# EAGLE board rfid_nrf24 (EAGLE 7.7.0)
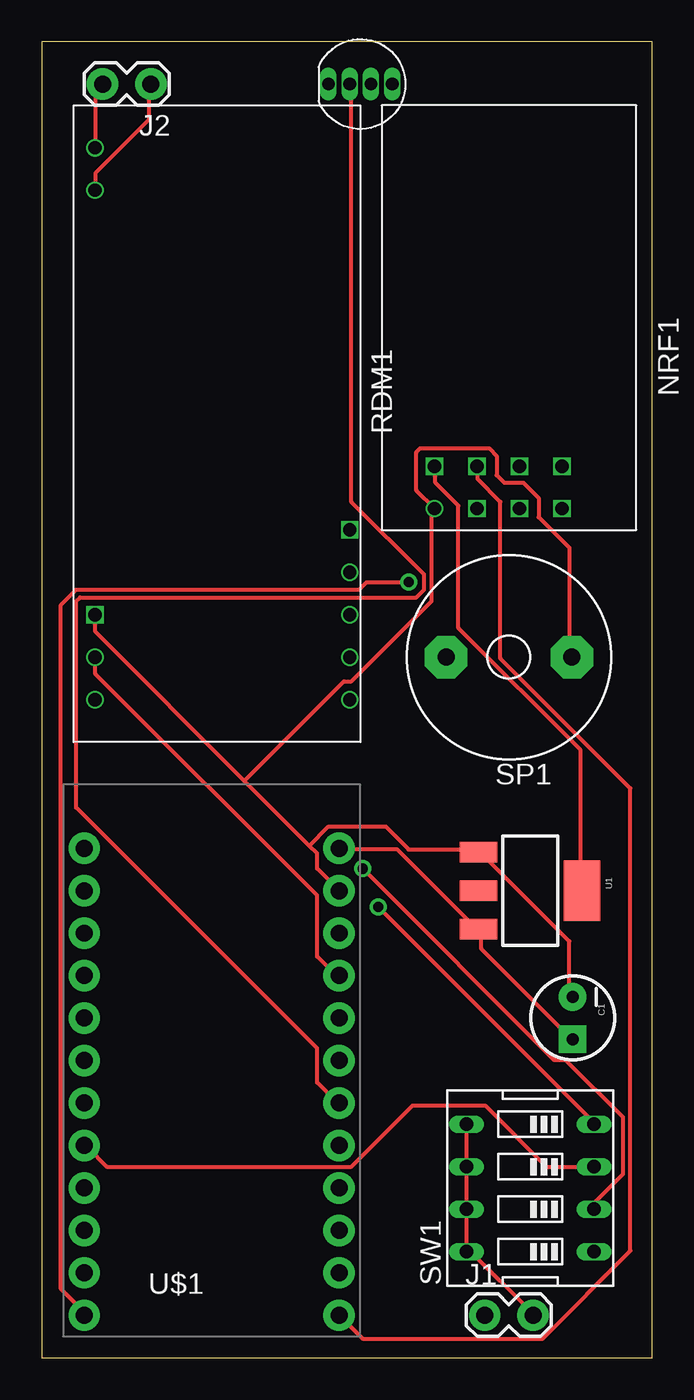
[diagram p0: board, top side]
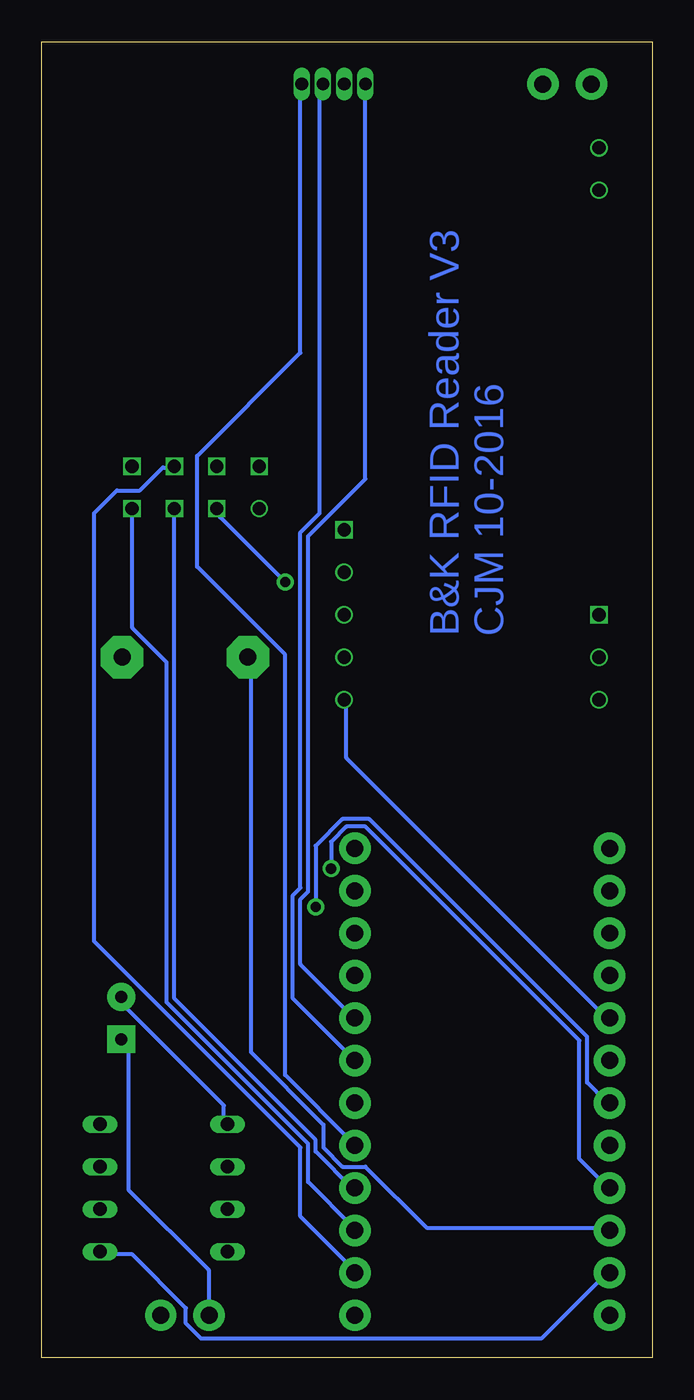
[diagram p1: board, bottom side, seen from below]

Size 36.5 x 78.73 mm. Coordinates in mm from the lower left corner, seen from the top.
Outline: 0,0 36.5,0 36.5,78.73 0,78.73 0,0
Copper layers (1*16): Top 0.035mm / dielectric 1.5mm / Bottom 0.035mm
Design rules "default *": minimum track width 10mil, minimum drill 24mil, track to track 8mil, track to pad 8mil, pad to pad 8mil, via to via 8mil, smd to smd 8mil, copper to edge 40mil, drill to drill 8mil, minimum pad ring 0mil, minimum via ring 8mil, stop-mask expansion 4mil, vias tented up to drill 0mil, thermal gap 10mil

## Footprints (pad centres in the part's own frame; a part is rotated, then mirrored left to right if it is on the bottom)
CPOL-RADIAL-10UF-25V = drill 0.7 pad 1.651 square: 1 1.27,0 | drill 0.7 pad 1.651: 2 -1.27,0
LED-RGB-THRU = drill 0.762 pad 0.889 long: 1 1.905,0; 2 0.635,0; 3 -0.635,0; 4 -1.905,0
1X02_LOCK = drill 1.016 pad 1.88: 1 -0.178,0; 2 2.718,0
NRF24L01 = drill 0.8 pad 0.813 square: CE -1.27,5.715; CSN -3.81,5.715; IRQ -3.81,10.795; MISO -1.27,10.795; MOSI -3.81,8.255; SCK -1.27,8.255; VCC -3.81,3.175 | drill 0.8 pad 0.813: GND -1.27,3.175
RDM6300 = drill 0.8 pad 0.813: +5V -10.16,17.145; ANT1 -33.02,1.905; ANT2 -35.56,1.905; LED -2.54,1.905; NC -7.62,17.145; RX -5.08,17.145; TX -2.54,17.145; VCC -5.08,1.905 | drill 0.8 pad 0.813 square: GND -12.7,17.145; GNDD -7.62,1.905
AL60P = drill 1.016 pad 2.54 octagon: 1 -3.759,0; 2 3.759,0
EDG-04 = drill 0.813 long: 1 -3.81,-3.81; 2 -1.27,-3.81; 3 1.27,-3.81; 4 3.81,-3.81; 5 3.81,3.81; 6 1.27,3.81; 7 -1.27,3.81; 8 -3.81,3.81
SOT223 = smd 1.219 x 2.235: 1 -2.311,-3.099; 2 0,-3.099; 3 2.311,-3.099 | smd 3.6 x 2.2: 4 0,3.099
ARDUINO_MINI = drill 1.016 pad 1.88: 1 -7.62,12.7; 2 -7.62,10.16; 3 -7.62,7.62; 4 -7.62,5.08; 5 -7.62,2.54; 6 -7.62,0; 7 -7.62,-2.54; 8 -7.62,-5.08; 9 -7.62,-7.62; 10 -7.62,-10.16; 11 -7.62,-12.7; 12 -7.62,-15.24; 13 7.62,-15.24; 14 7.62,-12.7; 15 7.62,-10.16; 16 7.62,-7.62; 17 7.62,-5.08; 18 7.62,-2.54; 19 7.62,0; 20 7.62,2.54; 21 7.62,5.08; 22 7.62,7.62; 23 7.62,10.16; 24 7.62,12.7

## Placement (x,y rotation side)
C1  100uf  [CPOL-RADIAL-10UF-25V]  31.75,20.32 270 top
D1  LED-RGB-CC-THRUCLEAR  [LED-RGB-THRU]  19.05,76.2 180 top
J1  5v  [1X02_LOCK]  26.67,2.54 0 top
J2  ANT  [1X02_LOCK]  6.35,76.2 180 top
NRF1  NRF24L01-MODULE  [NRF24L01]  20.32,49.53 270 top
RDM1  RDM6300  [RDM6300]  1.27,36.83 270 top
SP1  SPEAKER/AL60P  [AL60P]  27.94,41.91 180 top
SW1  ReadID  [EDG-04]  29.21,10.16 90 top
U1  3v3 Reg  [SOT223]  29.21,27.94 270 top
U$1  ARDUINO_MINI  [ARDUINO_MINI]  10.16,17.78 0 top

## Library data of the parts
C1 = SparkFun-Capacitors
D1 = SparkFun-LED; PROD_ID: DIO-08418
J1 J2 = SparkFun-Connectors
NRF1 = nrf24L01-module
RDM1 = RDM6300
SP1 = adafruit
SW1 = special
U1 = SparkFun-PowerIC; PROD_ID: VREG-08170
U$1 = SparkFun-Boards

## Nets
N$1: J2.2 RDM1.ANT2
N$2: SW1.1 U$1.11
N$3: NRF1.VCC U1.4
N$4: SP1.2 U$1.10
N$5: RDM1.TX U$1.5
N$6: D1.4 U$1.17
N$7: D1.3 U$1.19
N$8: D1.1 U$1.20
N$9: D1.2 U$1.18
N$10: NRF1.CE U$1.12
N$11: NRF1.CSN U$1.13
N$12: NRF1.SCK U$1.16
N$13: NRF1.MOSI U$1.14
N$14: NRF1.MISO U$1.15
N$16: SW1.2 U$1.9
N$17: SW1.3 U$1.8
N$18: SW1.4 U$1.7
N$19: J2.1 RDM1.ANT1
N$20: C1.1 J1.1 U1.3 U$1.24
N$21: RDM1.VCC U$1.21
N$22: C1.2 J1.2 NRF1.GND RDM1.GNDD SP1.1 SW1.5 SW1.6 SW1.7 SW1.8 U1.1 U$1.23

## Tracks (layer width: path | path; a pad name or v marks a point on that pad's centre or on a via)
N$1
  Top 0.254: RDM1.ANT2 3.2,72.47 3.2,75.89 3.43,76.12 J2.2
N$2
  Bottom 0.254: SW1.1 32.92,6.17 31.09,6.17 27.89,2.97 27.89,2.06 26.98,1.14 6.63,1.14 2.74,5.03 U$1.11
N$3
  Top 0.254: NRF1.VCC 23.55,53.26 23.55,52.35 24.92,50.98 24.92,43.66 32.23,36.35 32.23,28.12 U1.4
N$4
  Bottom 0.254: U$1.10 2.74,7.77 13.49,7.77 17.14,11.43 18.52,11.43 19.66,12.57 19.66,13.95 24,18.29 24,41.83 SP1.2
N$5
  Bottom 0.254: RDM1.TX 18.29,39.32 18.29,35.89 2.74,20.34 U$1.5
N$6
  Bottom 0.254: D1.4 21.03,76.12 21.03,60.12 27.2,53.95 27.2,47.32 21.95,42.06 21.95,16.92 17.83,12.8 U$1.17
N$7
  Bottom 0.254: U$1.19 21.49,21.49 21.49,27.66 21.03,28.12 21.03,49.38 19.89,50.52 19.89,76.12 D1.3
N$8
  Bottom 0.254: D1.1 17.14,52.58 20.57,49.15 20.57,27.89 21.03,27.43 21.03,23.55 17.83,20.34 U$1.20
N$9
  Top 0.254: D1.2 18.52,76.12 18.52,51.21 22.86,46.86 22.86,45.95 22.4,45.49 2.29,45.49 2.06,45.26 2.06,32.92 16.46,18.52 16.46,16.46 17.6,15.32 U$1.18
N$10  (via drill 0.61)
  Top 0.254: v21.95,46.41 19.43,46.41 18.97,45.95 2.06,45.95 1.14,45.03 1.14,4.12 2.52,2.74 U$1.12
  Bottom 0.254: v21.95,46.41 25.83,50.29 25.83,50.75 NRF1.CE
N$11
  Top 0.254: NRF1.CSN 26.06,53.26 26.06,52.58 27.43,51.21 27.43,41.83 35.2,34.06 35.2,6.4 29.95,1.14 19.2,1.14 17.83,2.52 U$1.13
N$12
  Bottom 0.254: NRF1.SCK 28.57,21.49 20.12,13.03 20.12,12.34 17.83,10.06 U$1.16
N$13
  Bottom 0.254: NRF1.MOSI 28.57,53.26 29.26,53.26 30.63,51.89 32,51.89 33.38,50.52 33.38,24.92 21.03,12.57 21.03,8.46 17.83,5.26 U$1.14
N$14
  Bottom 0.254: NRF1.MISO 31.09,50.75 31.09,43.66 29.03,41.6 29.03,21.26 20.57,12.8 20.57,10.52 17.83,7.77 U$1.15
N$16  (via drill 0.61)
  Top 0.254: v19.2,29.26 30.63,17.83 31.32,17.83 34.75,14.4 34.75,10.97 33.15,9.37 33.15,8.91 SW1.2
  Bottom 0.254: v19.2,29.26 19.2,30.86 18.29,31.77 17.14,31.77 4.34,18.97 4.34,11.89 2.74,10.29 U$1.9
N$17
  Top 0.254: SW1.3 30.18,11.43 26.52,15.09 22.17,15.09 18.52,11.43 3.89,11.43 2.74,12.57 U$1.8
N$18  (via drill 0.61)
  Top 0.254: v20.12,26.98 32.92,14.17 SW1.4
  Bottom 0.254: v20.12,26.98 20.12,30.63 18.52,32.23 16.92,32.23 3.89,19.2 3.89,16.46 2.74,15.32 U$1.7
N$19
  Top 0.254: RDM1.ANT1 3.2,69.95 3.2,70.87 6.4,74.07 6.4,76.12 J2.1
N$20
  Top 0.254: C1.1 31.55,19.2 26.29,24.46 26.29,25.6 U1.3 26.06,25.6 21.26,30.4 17.83,30.4 U$1.24
  Bottom 0.254: J1.1 26.52,2.74 26.52,5.26 31.32,10.06 31.32,18.75 31.55,18.97 C1.1
N$21
  Top 0.254: RDM1.VCC 3.2,41.83 3.2,40.92 16.46,27.66 16.46,24 17.6,22.86 U$1.21
N$22
  Top 0.254: C1.2 31.55,21.72 31.55,24.92 26.29,30.18 U1.1 26.06,30.4 21.95,30.4 20.57,31.77 17.14,31.77 16,30.63 | 25.38,11.43 25.38,13.95 SW1.5 | 25.38,11.43 25.38,8.91 SW1.7 25.38,8.69 25.38,6.4 SW1.8 25.6,6.4 29.26,2.74 J1.2 | 25.38,11.43 SW1.6 | 16,30.63 16.46,30.18 16.46,29.26 U$1.23 | 16,30.63 12.12,34.52 | 12.12,34.52 3.2,43.43 3.2,44.35 RDM1.GNDD | 12.12,34.52 18.06,40.46 18.52,40.46 23.32,45.26 23.32,50.75 NRF1.GND 22.4,51.89 22.4,54.18 22.63,54.41 26.75,54.41 27.2,53.95 27.2,52.81 27.66,52.35 28.8,52.35 29.72,51.44 29.72,50.29 31.55,48.46 31.55,42.06 SP1.1
  Bottom 0.254: C1.2 31.55,21.49 31.55,21.03 25.6,15.09 25.6,14.17 SW1.5

## Text on the board
Bottom: B&K RFID Reader V3 / CJM 10-2016